# Allegro board SCHEMAX7_v2.brd
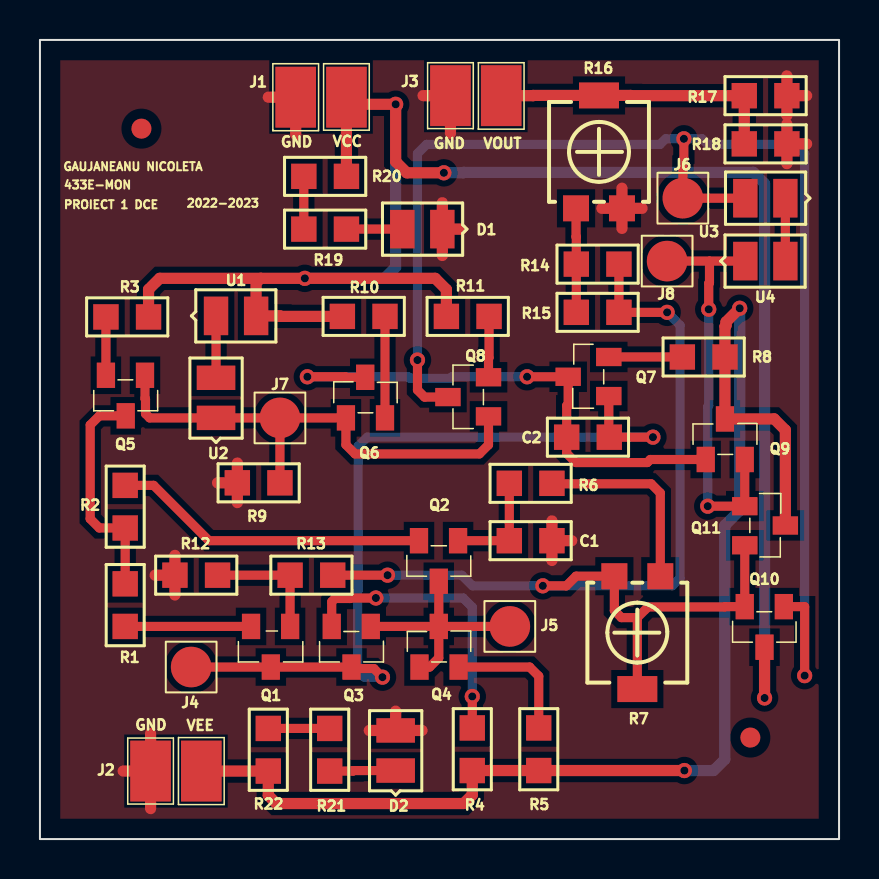
[diagram p0: board, top side]
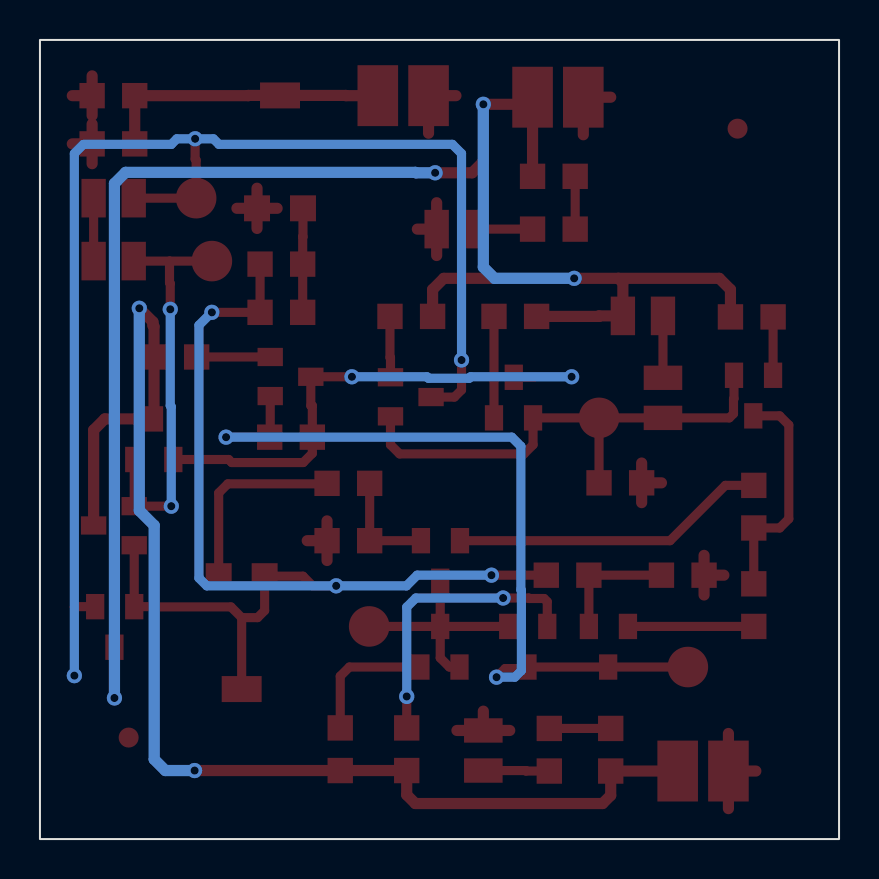
[diagram p1: board, bottom side, seen from below]

Outline 40 x 40 mm; copper layers: TOP, BOTTOM. Coordinates in mm from the lower left corner of the outline.
Outline path: rectangle 0,0 40,40

## Design rules (mm)
nets with their own width: min track width 0.457; nets N34251 N34351 N34371 N34417 N34463 N34497 N34527 N34533 N34539 N34613 N34631 N34855 N35163 N36105 N36735 N39886 N40235 N44884 N44890 N56090 N368401 TEST_1 TEST_2 TEST_3 TEST_4 TEST_5
nets with their own width: min track width 0.559; nets 0 VCC VEE VOUT

## Placement (name value [footprint] x y rotation side)
C1  22n  [SMC0805]  25.63 14.94 180 top
C2  10p  [SMC0805]  26.37 20.12 0 top
D1  LED  [SMD0805]  20.14 30.53 180 top
D2  LED  [SMD0805]  17.81 3.43 90 top
J1  CON2  [JUMPER2]  12.8 37.13 0 top
J2  CON2  [JUMPER2]  5.54 3.4 0 top
J3  CON2  [JUMPER2]  23.09 37.21 180 top
J4  CON1  [JUMPER1]  7.57 8.61 0 top
J5  CON1  [JUMPER1]  23.52 10.64 0 top
J6  CON1  [JUMPER1]  32.18 32.08 0 top
J7  CON1  [JUMPER1]  12.01 21.08 0 top
J8  CON1  [JUMPER1]  31.39 28.93 0 top
NOREF  -  []  40 0 90 top
NOREF#2  -  [unnamed#2]  35.56 5.08 0 top
NOREF#3  -  []  0 40 0 top
NOREF#4  -  [unnamed#2]  5.08 35.56 0 top
Q1  QBC856B  [TO236]  12.52 10.52 90 top
Q2  QBC856B  [TO236]  20.93 14.81 90 top
Q3  QBC817-25  [TO236]  16.56 10.52 90 top
Q4  QBC817-25  [TO236]  19 8.74 270 top
Q5  QBC807-25  [TO236]  5.26 23.09 90 top
Q6  QBC807-25  [TO236]  15.32 21.21 270 top
Q8  QBC807-25  [TO236]  22.33 21.16 0 top
Q9  QBC807-25  [TO236]  33.32 19.13 270 top
Q10  QBC817-25  [TO236]  37.24 11.51 90 top
Q11  QBC807-25  [TO236]  35.41 16.66 180 top
Q*  QBC817-25  [TO236]  28.35 22.17 0 top
R1  100  [SMR0805]  4.27 10.64 90 top
R2  100  [SMR0805]  4.27 17.7 270 top
R3  330  [SMR0805]  3.3 26.14 0 top
R4  51  [SMR0805]  21.64 3.43 90 top
R5  51  [SMR0805]  24.97 3.43 90 top
R6  910  [SMR0805]  23.5 17.81 0 top
R7  10k  [TS53YL]  28.75 13.16 90 top
R8  10  [SMR0805]  34.29 24.13 180 top
R9  910  [SMR0805]  9.88 17.83 0 top
R10  330  [SMR0805]  17.27 26.16 180 top
R11  220  [SMR0805]  22.48 26.16 180 top
R12  10k  [SMR0805]  6.76 13.21 0 top
R13  10k  [SMR0805]  12.52 13.21 0 top
R14  2.7k  [SMR0805]  28.98 28.78 180 top
R15  2.7k  [SMR0805]  28.98 26.37 180 top
R16  100  [TS53YL]  29.13 31.57 270 top
R17  10k  [SMR0805]  37.39 37.21 180 top
R18  10k  [SMR0805]  37.39 34.8 180 top
R19  82  [SMR0805]  15.34 30.53 180 top
R20  220  [SMR0805]  13.21 33.17 0 top
R21  82  [SMR0805]  14.5 3.4 90 top
R22  220  [SMR0805]  11.43 5.54 270 top
U1  1N4148  [SMD0805]  8.81 26.19 0 top
U2  1N4148  [SMD0805]  8.81 21.08 90 top
U3  1N4148  [SMD0805]  37.31 32.08 180 top
U4  1N4148  [SMD0805]  35.31 28.93 0 top

## Library data of the parts
C1 C2 = C
D1 D2 = LED_0
J1-J3 = CON2
J4-J8 = CON1
Q1 Q2 = QBC856B_0
Q3 Q4 Q10 Q* = QBC817-25_2
Q5 Q6 Q8 Q9 Q11 = QBC807-25_0
R1-R6 R8-R15 R17-R22 = R
R7 R16 = POT_3
U1-U4 = 1N4148_3

## Footprints (pads in the part's own frame, mm; a bottom-side part is the same pattern mirrored in y, then rotated)
JUMPER1
  round 2.032 smd: 1(0,0)
JUMPER2
  rect 2.032x3.048 smd: 1(0,0) 2(2.54,0)
SMC0805
  rect 1.27x1.27 smd: 1(0,0) 2(2.134,0)
SMD0805
  rect 1.219x1.93 smd: A(2.007,0) C(0,0)
SMR0805
  rect 1.27x1.27 smd: 1(0,0) 2(2.134,0)
TO236
  rect 1.27x0.914 smd: 1(0.127,0) 2(0.127,1.956) 3(-1.905,0.965)
TS53YL
  rect 1.3x1.3 smd: 1(0,0) 3(0,-2.3)
  rect 1.3x2 smd: 2(-5.65,-1.15)
unnamed#2
  round 1 smd: (0,0)

## Nets
VCC: J1.2 Q10.3(C) R3.2 R10.2 R11.2 R20.2 U1.A(ANODE)
VEE: J2.2 Q9.3(C) Q11.3(C) R4.1 R5.1 R8.1 R22.2
0: C1.1 D1.C(CATHODE) D2.A(ANODE) J1.1 J2.1 J3.2 R9.1 R12.1 R16.1 R17.1 R18.1
TEST_1: C2.2 J4.1 Q1.3(C) Q3.3(C) Q*.1(B)
TEST_2: J5.1 Q2.3(C) Q3.1(B) Q4.1(B) Q4.3(C)
TEST_3: J7.1 Q5.1(B) Q6.1(B) Q8.1(B) R9.2 U2.C(CATHODE)
TEST_4: J6.1 Q8.3(C) Q10.1(B) U3.A(ANODE)
TEST_5: J8.1 Q9.2(E) Q11.1(B) U4.C(CATHODE)
VOUT: J3.1 R16.2(T) R17.2 R18.2
N34251: C2.1 Q6.3(C) Q9.1(B) Q*.3(C)
N34351: Q10.2(E) Q11.2(E) R7.1 R7.2(T) R13.2 R14.1 R15.1
N34371: Q*.2(E) R8.2
N34417: Q1.2(E) R1.1
N34463: Q5.3(C) R1.2 R2.2
N34497: Q2.2(E) R2.1
N34527: Q3.2(E) R4.2
N34533: Q4.2(E) R5.2
N34539: Q5.2(E) R3.1
N34613: Q1.1(B) R12.2 R13.1
N34631: Q6.2(E) R10.1
N34855: C1.2 Q2.1(B) R6.1
N35163: Q8.2(E) R11.1
N36105: R6.2 R7.3(2)
N36735: U3.C(CATHODE) U4.A(ANODE)
N39886: R14.2 R15.2 R16.3(2)
N40235: R19.2 R20.1
N44884: R21.2 R22.1
N44890: D2.C(CATHODE) R21.1
N56090: D1.A(ANODE) R19.1
N368401: U1.C(CATHODE) U2.A(ANODE)

## Via types
v1: diameter 0.762, hole 0.406, TOP to BOTTOM, 20 vias

## Routing (per net, layer and track width the routed paths; a pad name or vN(x,y) marks a point on that pad's centre or on a via; arc(x,y) is an arc through that point)
VCC: length 93.9
  TOP w0.559: 15.34,36.78 R20.2 ; 15.34,36.78 J1.2 ; 15.34,36.78 v1(17.81,36.78) 17.81,33.91 18.36,33.35 v1(20.22,33.35) ; R3.2 5.44,27.51 5.99,28.07 11.05,28.07 ; 11.05,28.07 10.82,27.84 U1.A 12.01,26.19 12.01,26.16 R10.2 ; 11.05,28.07 v1(13.26,28.07) 19.79,28.07 20.35,27.51 R11.2 ; Q10.3 v1(36.27,7.06)
  BOTTOM w0.559: v1(20.22,33.35) 21.18,33.35 21.21,33.37 35.71,33.37 36.27,32.81 v1(36.27,7.06) ; v1(17.81,36.78) 17.81,28.63 17.25,28.07 v1(13.26,28.07)
VEE: length 66
  TOP w0.559: Q11.3 37.31,20.47 36.75,21.03 Q9.3 R8.1 34.29,25.65 34.34,25.71 34.34,25.89 v1(35.03,26.57) ; J2.2 R22.2 11.43,2.18 11.84,1.78 21.21,1.78 21.64,2.21 R4.1 R5.1 v1(32.26,3.43)
  BOTTOM w0.559: v1(35.03,26.57) 35.03,16.44 34.28,15.7 34.28,3.99 33.72,3.43 v1(32.26,3.43)
0: length 37.7
  TOP w0.559: 19.18,37.21 J3.2 20.55,35.33 ; R16.1 29.13,32.58 ; R16.1 30.14,31.57 ; R16.1 28.13,31.57 ; R16.1 29.13,30.57 ; J2.1 5.54,5.28 ; J2.1 4.17,3.4 ; J2.1 5.54,1.52 ; R18.1 37.39,35.79 ; R18.1 37.39,33.81 ; R18.1 38.38,34.8 ; 25.63,13.94 C1.1 ; C1.1 25.63,15.93 ; C1.1 26.62,14.94 ; R12.1 6.76,14.2 ; R12.1 5.77,13.21 ; R12.1 6.76,12.22 ; D1.C 21.11,30.53 ; D1.C 20.14,31.85 ; D1.C 20.14,29.21 ; 12.8,35.25 J1.1 11.43,37.13 ; 8.89,17.83 R9.1 ; R9.1 9.88,16.84 ; R9.1 9.88,18.82 ; R17.1 37.39,38.2 ; R17.1 37.39,36.22 ; R17.1 38.38,37.21 ; 16.48,5.44 D2.A ; D2.A 17.81,6.4 ; D2.A 19.13,5.44
TEST_1: length 41.7
  TOP w0.457: J4.1 Q1.3 Q3.3 15.6,8.53 16.71,8.53 v1(17.14,8.1) ; v1(30.68,20.12) C2.2 28.47,20.12 Q*.1
  BOTTOM w0.457: v1(30.68,20.12) 16.38,20.12 15.93,19.66 15.93,12.47 15.9,12.44 15.9,8.43 16.23,8.1 v1(17.14,8.1)
TEST_2: length 11.9
  TOP w0.457: Q4.3 19.96,9.07 19.51,8.61 Q4.1 ; Q4.3 Q2.3 ; Q4.3 Q3.1 ; Q4.3 J5.1
TEST_3: length 25.6
  TOP w0.457: Q5.1 5.26,22.05 5.28,22.02 5.28,21.29 5.49,21.08 U2.C J7.1 ; J7.1 Q6.1 15.32,19.74 15.77,19.28 22,19.28 22.45,19.74 Q8.1 ; J7.1 R9.2
TEST_4: length 70.2
  TOP w0.457: Q10.1 38.28,11.63 v1(38.28,8.18) ; v1(18.9,23.98) 18.9,22.48 19.25,22.12 Q8.3 ; v1(32.23,35.05) 32.23,34.04 32.18,33.99 J6.1 U3.A
  BOTTOM w0.457: v1(18.9,23.98) 18.9,34.32 19.35,34.77 31.04,34.77 31.32,35.05 v1(32.23,35.05) 33.15,35.05 33.43,34.77 37.82,34.77 38.28,34.32 v1(38.28,8.18)
TEST_5: length 20.4
  TOP w0.457: v1(33.43,16.66) Q11.1 Q9.2 ; v1(33.48,26.52) 33.48,27.81 33.51,27.85 33.51,28.93 ; J8.1 33.51,28.93 ; 33.51,28.93 U4.C
  BOTTOM w0.457: v1(33.43,16.66) 33.43,21.64 33.48,21.69 v1(33.48,26.52)
VOUT: length 14.6
  TOP w0.559: J3.1 24.69,37.21 24.69,37.22 R16.2 29.57,37.22 29.57,37.21 R17.2 R18.2
N34251: length 27.2
  TOP w0.457: v1(13.39,23.14) 15.29,23.14 15.29,23.11 Q6.3 ; v1(24.38,23.14) Q*.3 26.44,21.69 26.37,21.69 C2.1 26.37,19.3 26.82,18.85 30.4,18.85 30.55,19 Q9.1
  BOTTOM w0.457: v1(13.39,23.14) 18.44,23.14 18.52,23.06 20.55,23.06 20.62,23.14 v1(24.38,23.14)
N34351: length 55.2
  TOP w0.457: 29.9,11.08 29.1,11.08 28.75,11.44 R7.1 26.83,13.16 26.35,12.67 v1(25.17,12.67) ; 29.9,11.08 30.44,11.62 34.28,11.62 34.29,11.63 Q10.2 Q11.2 ; 29.9,11.08 R7.2 ; v1(31.39,26.37) R15.1 R14.1 ; v1(17.4,13.21) R13.2
  BOTTOM w0.457: v1(17.4,13.21) 21.12,13.21 21.65,12.67 v1(25.17,12.67) 31.65,12.67 32.04,13.07 32.04,25.72 v1(31.39,26.37)
N34371: length 3.7
  TOP w0.457: R8.2 Q*.2
N34417: length 6.3
  TOP w0.457: Q1.2 R1.1
N34463: length 11.4
  TOP w0.457: R1.2 R2.2 2.97,15.57 2.51,16.03 2.51,20.73 2.97,21.18 Q5.3
N34497: length 15.9
  TOP w0.457: Q2.2 8.46,14.94 5.69,17.7 R2.1
N34527: length 14.6
  TOP w0.457: Q3.2 14.61,11.88 14.76,12.04 15.51,12.04 15.54,12.06 v1(16.81,12.06) ; R4.2 v1(21.64,7.14)
  BOTTOM w0.457: v1(21.64,7.14) 21.64,11.61 21.18,12.06 v1(16.81,12.06)
N34533: length 6.8
  TOP w0.457: Q4.2 24.51,8.61 24.97,8.15 R5.2
N34539: length 2.9
  TOP w0.457: R3.1 Q5.2
N34613: length 6.2
  TOP w0.457: R12.2 R13.1 Q1.1
N34631: length 5.1
  TOP w0.457: Q6.2 R10.1
N34855: length 5.4
  TOP w0.457: Q2.1 23.5,14.94 R6.1
N35163: length 3.1
  TOP w0.457: Q8.2 22.45,24.1 22.48,24.1 R11.1
N36105: length 9.8
  TOP w0.457: R7.3 31.05,17.32 30.6,17.78 25.63,17.78 R6.2
N36735: length 3.1
  TOP w0.457: U4.A U3.C
N39886: length 5.2
  TOP w0.457: R15.2 R14.2 26.85,30.15 26.83,30.15 R16.3
N40235: length 2.6
  TOP w0.457: R19.2 R20.1
N44884: length 3.1
  TOP w0.457: R22.1 R21.2
N44890: length 3.3
  TOP w0.457: D2.C 15.67,3.43 15.67,3.4 R21.1
N56090: length 2.8
  TOP w0.457: R19.1 D1.A
N368401: length 3.1
  TOP w0.457: U1.C U2.A

## Copper pours and planes (outline as drawn; the poured copper is in the pictures)
0 on TOP: 1.02,1.02 1.02,38.98 38.98,38.98 38.98,1.02

## Text on the board
Ref Des/Silkscreen Top: GAUJANEANU NICOLETA | 433E-MON | PROIECT 1 DCE | 2022-2023 | GND | VEE | VCC | VOUT | Q7
XSECTION_CHART: *  SURFACE - AIR 0 MIL | L1: TOP CONDUCTOR - COPPER 0.71 MIL | *  DIELECTRIC - FR-4 57.64 MIL | L2: BOTTOM CONDUCTOR - COPPER 0.71 MIL | DESIGN CROSS SECTION CHART | ___________________________ | TOTAL THICKNESS 59.06 MIL | FIGURE | SIZE | 16.0 | DRILL CHART: TOP to BOTTOM | ALL UNITS ARE IN MILS | PLATED | QTY | 20 | 1-2
